# Altium PCB vaja_1_2.PcbDoc
Units mm, origin at the board's own origin, x right, y up, seen from the top; angles counter-clockwise.
Board outline 20 x 14 mm, 2 copper layers (Top Layer, Bottom Layer), stack 1.621 mm thick; 10 components, 6 nets, 25 pads, 19 vias.
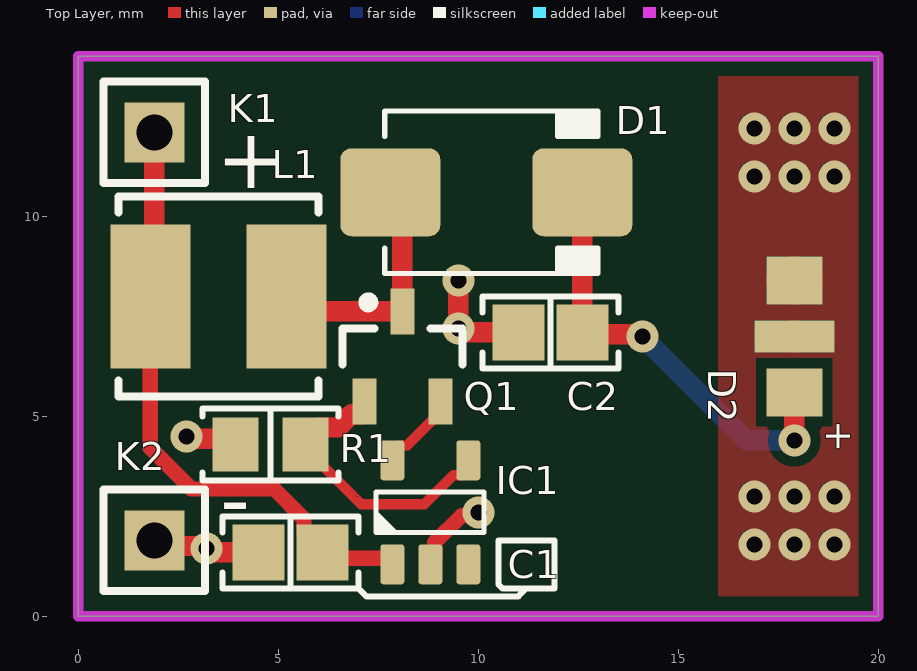
[diagram p0: Top Layer view]
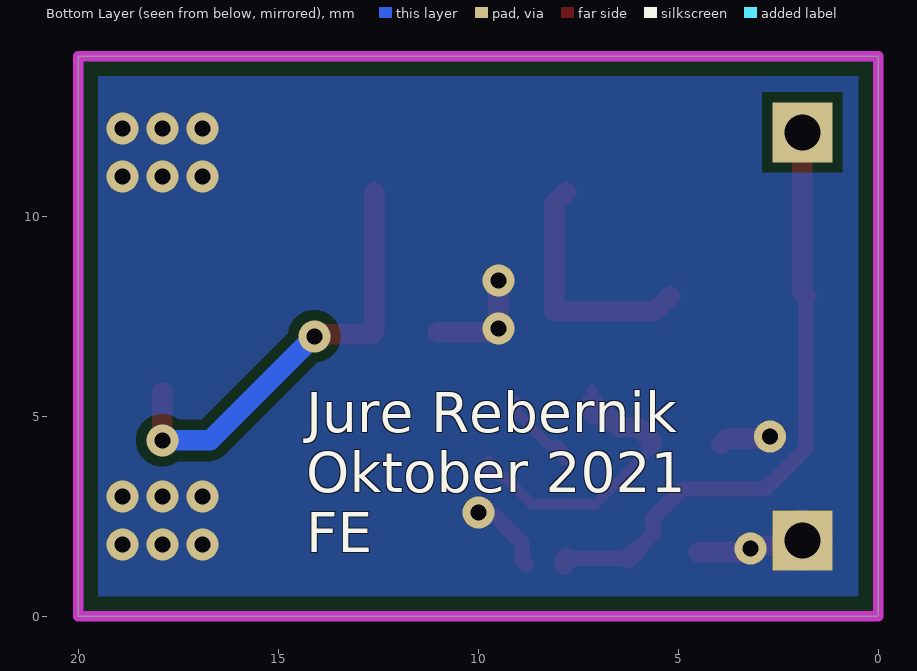
[diagram p1: Bottom Layer view, seen from below]
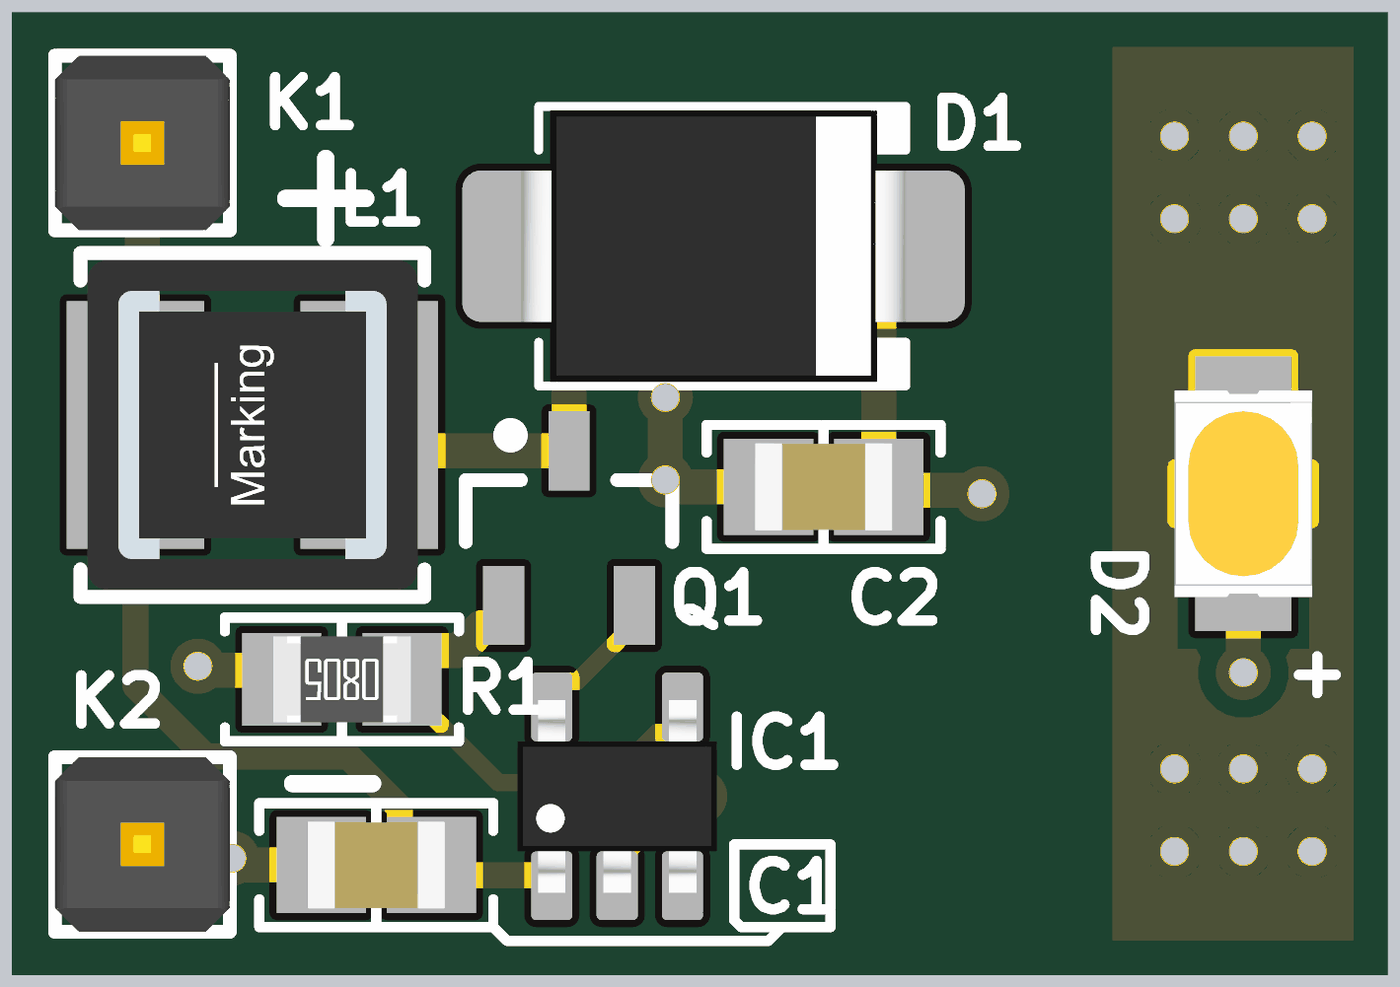
[diagram p2: 3D render of the assembled board from above, using the file's embedded part models]

## Layer stack, top to bottom
Top Solder: solder mask 0.0102, Solder Resist, Dk 3.5
Top Layer: signal copper 0.0356
Dielectric 1: dielectric 1.55, FR-4, Dk 4.8
Bottom Layer: signal copper 0.0356
Bottom Solder: solder mask 0.0102, Solder Resist, Dk 3.5

## Board outline
0,0 20,0 20,14 0,14

## Design rules (kind name [scope] priority, off if disabled: settings)
Clearance [All] p1: gap=0.254 ignorepadtopadclearanceinfootprint=FALSE
PolygonConnect LedHeatPad [InNamedPolygon('GND_L01_P000')] p1: connectstyle=Direct reliefconductorwidth=0.254 reliefentries=4 polygonreliefangle="90 Angle" airgapwidth=0.254
PolygonConnect [HasFootprint('No Footprint') And OnLayer('Bottom Layer')] p2: connectstyle=Relief reliefconductorwidth=0.254 reliefentries=4 polygonreliefangle="90 Angle" airgapwidth=0.254
RoutingVias [All] p1: holewidth=0.4 width=0.8 viastyle="Through Hole" minholewidth=0.4 minwidth=0.8 maxholewidth=0.711 maxwidth=1.27
SilkToSilkClearance [All] p1 off: silktosilkclearance=0.254
SolderMaskExpansion [All] p1: expansion=0.102 istentingtop=FALSE
Width [All] p1: maxlimit=2 minlimit=0.254 preferedwidth=0.254
29 further rules are at their usual default settings.

## Components (designator, comment, footprint, x,y, rotation, side; value= is the part's Value field where it differs from the comment)
C1 "100n" "CAP 0805_2012" 5.3,1.6 r180 top
C2 "2u2" "CAP 0805_2012" 11.8,7.1 r180 top
D1 "SK14B" DO-214AA 10.2,10.6 r0 top
D2 "158302250" WL-SWTP_3022 17.9,7 r270 top
IC1 "ZXSC300" SOT23-5 8.8,2.6 r90 top
K1 "H1x1" HDR1X1 1.9,12.1 r270 top
K2 "H1x1" HDR1X1 1.9,1.9 r90 top
L1 "100uH, 0.42A" WE-LQFS_4818 3.5,8 r90 top
Q1 "PBSS4120T" SOT23_N 8.1,6.5 r90 top
R1 "0R13" "RES 0805_2012" 4.8,4.3 r180 top

## Footprints (in the part's own frame and the unit in brackets; to place one, negate y for a bottom-side part, rotate by r counter-clockwise, add the part's x,y. Pads: shape width x height; smd on the part's side, far side on the other; paste and mask are expansions set on the pad)
"CAP 0805_2012" [mm] "Chip Capacitor, 2-Leads, Body 2.00x1.20mm, IPC Medium Density"
  rect 1.3x1.4 smd: 1(-0.8,0) 2(0.8,0)
  silkscreen extent -1.7,-0.9 1.7,0.9, body extent -1,-0.64 1,0.64, height 1.26
DO-214AA [mm] "JEDEC DO214 variation AA. SMB"
  round 0.508 on Mech15: 0(0,0)
  rrect25% 2.5x2.2 smd: 1(2.4,0) 2(-2.4,0)
  silkscreen extent -2.54,-2.03 2.79,2.03, body extent -2.8,-1.97 2.8,1.98, height 2.62
HDR1X1 [mm] "Connector; Header; 2 Position"
  rect 1.5x1.5 hole 0.9: 1(0,0)
  silkscreen extent -1.27,-1.27 1.27,1.27, body extent -1.27,-1.27 1.27,1.27, height 9.5
"RES 0805_2012" [mm] "Chip Resistor, 2-Leads, Body 2.00x1.25mm, IPC Medium Density"
  rect 1.15x1.35 smd: 1(-0.875,0) 2(0.875,0)
  silkscreen extent -1.7,-0.9 1.7,0.9, body extent -1,-0.62 1,0.63, height 0.6
SOT23-5 [mm]
  round 0.5 on Mech15: 0(0,0)
  rrect25% 1x0.6 smd: 1(-1.3,0.95) 2(-1.3,0) 3(-1.3,-0.95) 4(1.3,-0.95) 5(1.3,0.95)
  silkscreen extent -0.51,-1.35 0.51,1.35, body extent -1.4,-1.45 1.4,1.45, height 1.44
SOT23_N [mm] "SOT23, 3-Leads, Body 2.9x1.3mm, Pitch 0.95mm, Lead Span 2.3mm - Reverse Pinning, IPC Medium Density"
  rect 1.15x0.6 smd: 1(1.125,0) 2(-1.125,-0.95) 3(-1.125,0.95)
  silkscreen extent -0.2,-1.5 1.47,1.5, body extent -0.7,-1.5 0.7,1.5, height 1.1
WE-LQFS_4818 [mm] "SMT Power Inductor, body 4.8x4.8mm"
  rect 3.6x2 smd: 1(0,1.7) 2(0,-1.7)
  silkscreen extent -2.5,-2.5 2.5,2.5, body extent -2.4,-2.4 2.4,2.4, height 1.8
WL-SWTP_3022 [mm] "SMD White Top view PLCC, body 3x2.1mm"
  rect 1.2x1.4 smd: 1(-1.4,0) 2(1.4,0)
  rect 0.8x2 smd: 3(0,0)
  body extent -1.5,-1 1.5,1, height 0.8

## Part data
C1 C2: library part C, "Capacitor"
D1: "Schottky"
D2: "WL-SWTP SMT White Top view PLCC, size 3022, Daylight, 3.2V, 120deg", Color Rendering Index typ.=85, Correlated Color Temperature typ.=5000K, Emitting Color=Daylight, Forward Voltage typ.=3.2V, Manufacturer="Wurth Elektronik", Operating Temperature="-40 to +85degC", Chip Technology=InGaN, ComponentLink1Description=Manufacturer, ComponentLink1URL=http://www.we-online.de, ComponentLink2Description=Datasheet, ComponentLink2URL=https://www.we-online.com/catalog/datasheet/158302250.pdf, Luminous Flux typ.=22lm, Manufacturer Part Number=158302250, Mounting Technology=SMT, Packaging="Tape and Reel", Published Date="April 2021", Size=3022, Viewing Angle=120deg
IC1: "Led driver IC"
K1 K2: "Header 1x1 (male)"
L1: library part 74406042101, "WE-LQFS SMT Power Inductor, size 4818, 100uH, 0.42A", DC Resistance max.=1386mOhm, DC Resistance typ.=1155mOhm, Inductance=100uH, Manufacturer="Wurth Elektronik", Operating Temperature="-40 to +125degC", Rated Current=0.42A, Saturation Current=0.32A, Self Resonant Frequency=15MHz, ComponentLink1Description=Manufacturer, ComponentLink1URL=http://www.we-online.de, ComponentLink2Description=Datasheet, ComponentLink2URL=https://www.we-online.com/catalog/datasheet/74406042101.pdf, Manufacturer Part Number=74406042101, Mounting Technology=SMT, Packaging="Tape and Reel", Published Date="April 2020", Size=4818
Q1: library part NPN, "NPN Bipolar Transistor", Code_JEDEC=TO-226-AA, LatestRevisionDate=17-Jul-2002, LatestRevisionNote="Re-released for DXP Platform.", PackageDescription="TO, Flat Index; 3 In-Line, Axial Leads; Body Dia. 4.8mm; Leads 0.55 x 0.51 mm (max)", PackageReference=TO-226-AA, Published=8-Jun-2000, Publisher="Altium Limited"
R1: library part R, "R"

## Via types
v1: diameter 0.8, hole 0.4, Top Layer to Bottom Layer, tented both sides, 19 vias

## Nets (pads, with @x,y where several pads share a name; then routed paths per layer and width w, separated by ;. In a path a pad name is that pad's centre, name@x,y a point inside that pad or via, vN(x,y) a via of type N, cw(c..) or ccw(c..) an arc to the next point about the centre after c; other vN are vias at no path point)
GND: C1.2 C2.2 D2.1 D2.3 IC1.2 K2.1 R1.2 | length 8.7
  Top Layer w0.381: IC1.2 8.909,1.409 8.909,1.844 9.585,2.52 9.92,2.52 v1(10,2.6)
  Top Layer w0.508: K2.1 2.044,1.756 3.144,1.756 v1(3.2,1.7) 3.3,1.6 C1.2 ; v1(2.708,4.492) 2.764,4.436 3.789,4.436 R1.2 ; v1(9.5,7.2) v1(9.5,8.4) ; v1@9.51,7.21 9.569,7.21 9.679,7.1 C2.2
  other v1: 16.9,1.8 17.9,1.8 18.9,1.8 16.9,3 17.9,3 18.9,3 16.9,11 17.9,11 18.9,11 16.9,12.2 17.9,12.2 18.9,12.2
NetD1_2: D1.2 L1.2 Q1.1 | length 6.2
  Top Layer w0.508: L1.2 5.575,7.625 Q1.1 8.1,10.3 D1.2
NetIC1_4: IC1.4 Q1.3 R1.1 | length 7.7
  Top Layer w0.254: R1.1 5.675,4.2 7.075,2.8 8.65,2.8 9.377,3.527 9.577,3.527 9.75,3.7 IC1.4 ; Q1.3 Q1.3@7.15,5.65
  Top Layer w0.508: R1.1 5.675,4.4 5.996,4.721 6.496,4.721 6.829,5.054 7.104,5.054 7.15,5.1 Q1.3
NetIC1_5: IC1.5 Q1.2 | length 2.1
  Top Layer w0.254: IC1.5 7.85,4.1 8.023,4.273 8.223,4.273 9.05,5.1 Q1.2
Vin: C1.1 IC1.1 K1.1 L1.1 | length 15.5
  Top Layer w0.381: L1.1 1.8,4.206 2.825,3.18 4.898,3.18 5.64,2.438 5.64,2.06 C1.1 ; C1.1@6.25,1.45 IC1.1@7.804,1.45
  Top Layer w0.508: L1.1 1.9,8.1 K1.1 ; C1.1 C1.1@6.25,1.45 ; IC1.1@7.804,1.45 7.85,1.404 IC1.1
Vout: C2.1 D1.1 D2.2 | length 11.2
  Top Layer w0.508: D1.1 C2.1 12.65,7.05 14.05,7.05 v1(14.1,7) ; v1(17.9,4.4) D2.2
  Bottom Layer w0.508: v1(14.1,7) 16.7,4.4 v1@18,4.4
pads on no net: D1.0 IC1.0 IC1.3

## Polygon pours and split planes (outlines as drawn)
GND on Top Layer "GND_L01_P000" (solid, pour order 0): 16,13.5 16,0.5 19.5,0.5 19.5,13.5
GND on Bottom Layer "GND_L02_P001" (solid, pour order 1): 0.5,13.5 0.5,0.5 19.5,0.5 19.5,13.5

## Keep-outs
Keep-Out Layer:
  the board outline again, w0.254

## Silkscreen, mask and mechanical layers (free items; w line width, h text height)
Top Overlay:
  lines w0.15: 7,0.7 7.2,0.5 ; 7.2,0.5 7.2,0.5 ; 7.2,0.5 11,0.5 11.2,0.7 ; 11.2,0.7 10.6,0.7 10.5,0.8 10.5,1.9 11.9,1.9 11.9,0.7 11.2,0.7
  text "+" at 3.454,10.7 h1.52
  text "-" at 3.554,2.192 h1.52
Bottom Overlay:
  text "Jure Rebernik / Oktober 2021 / FE" at 14.3,1.6 h1

## Dimensions
0,0 to 16,0 on Mechanical 1
0,0 to 0,14 on Mechanical 1
0,14 to 20,14 on Mechanical 1

## Text inside footprints (layer, text, board x,y; h text height)
D2: Top Overlay "+" at 18.7,4.9 h0.7 r270